# EAGLE board SR_Board (EAGLE 7.6.0)
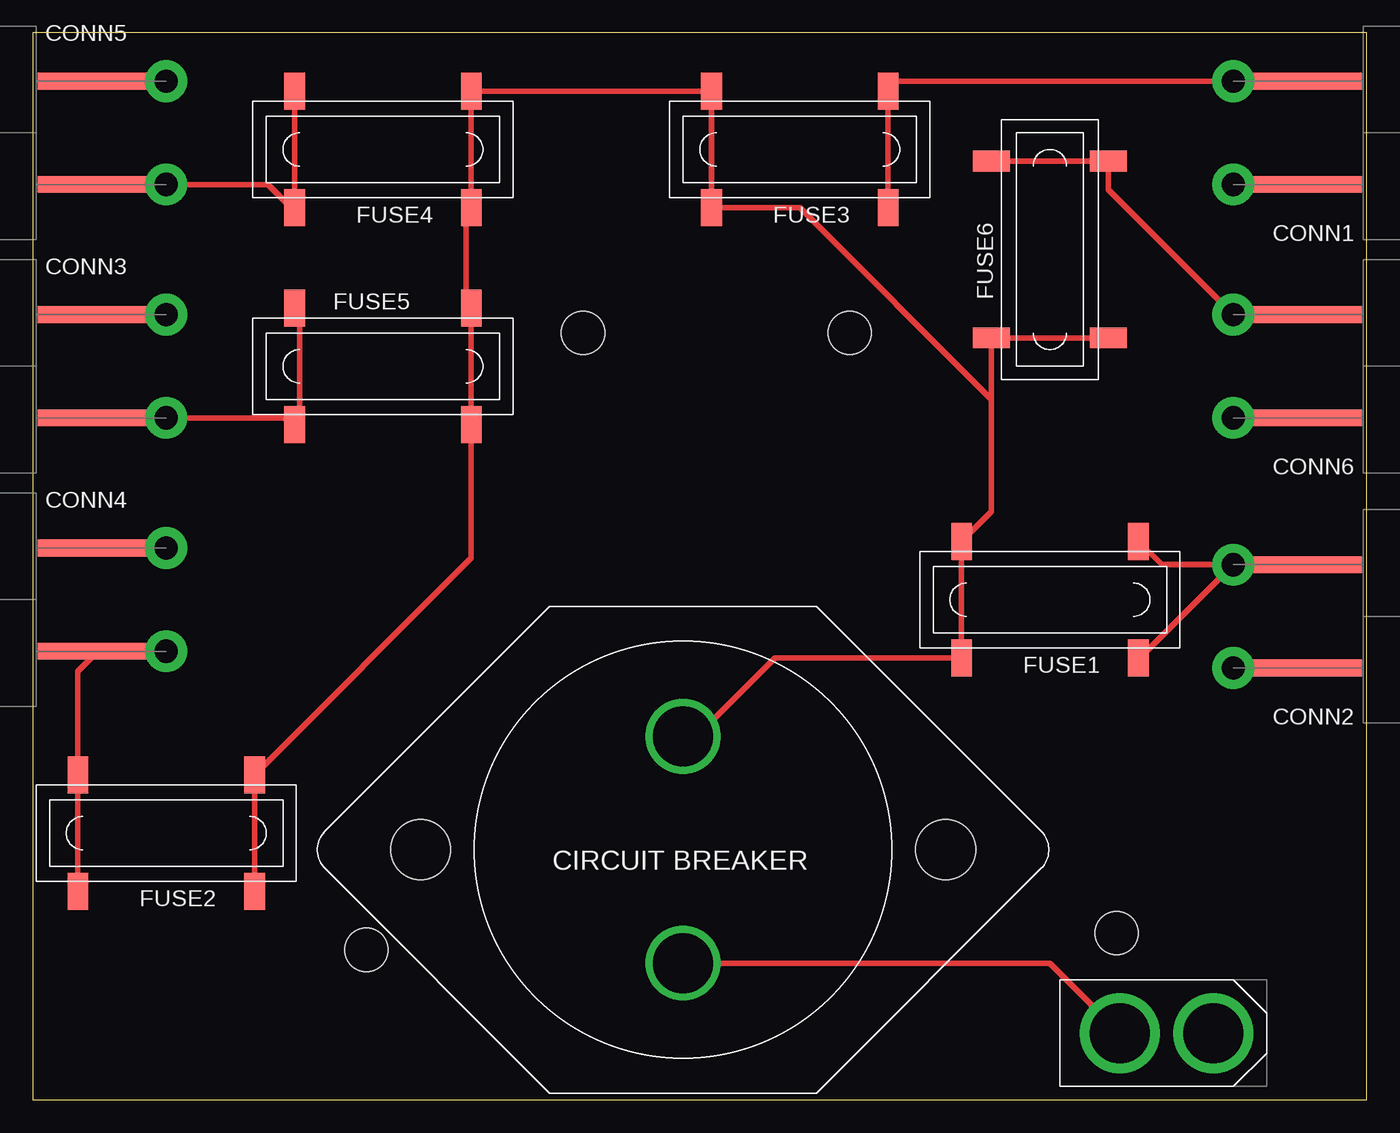
[diagram p0: board, top side]
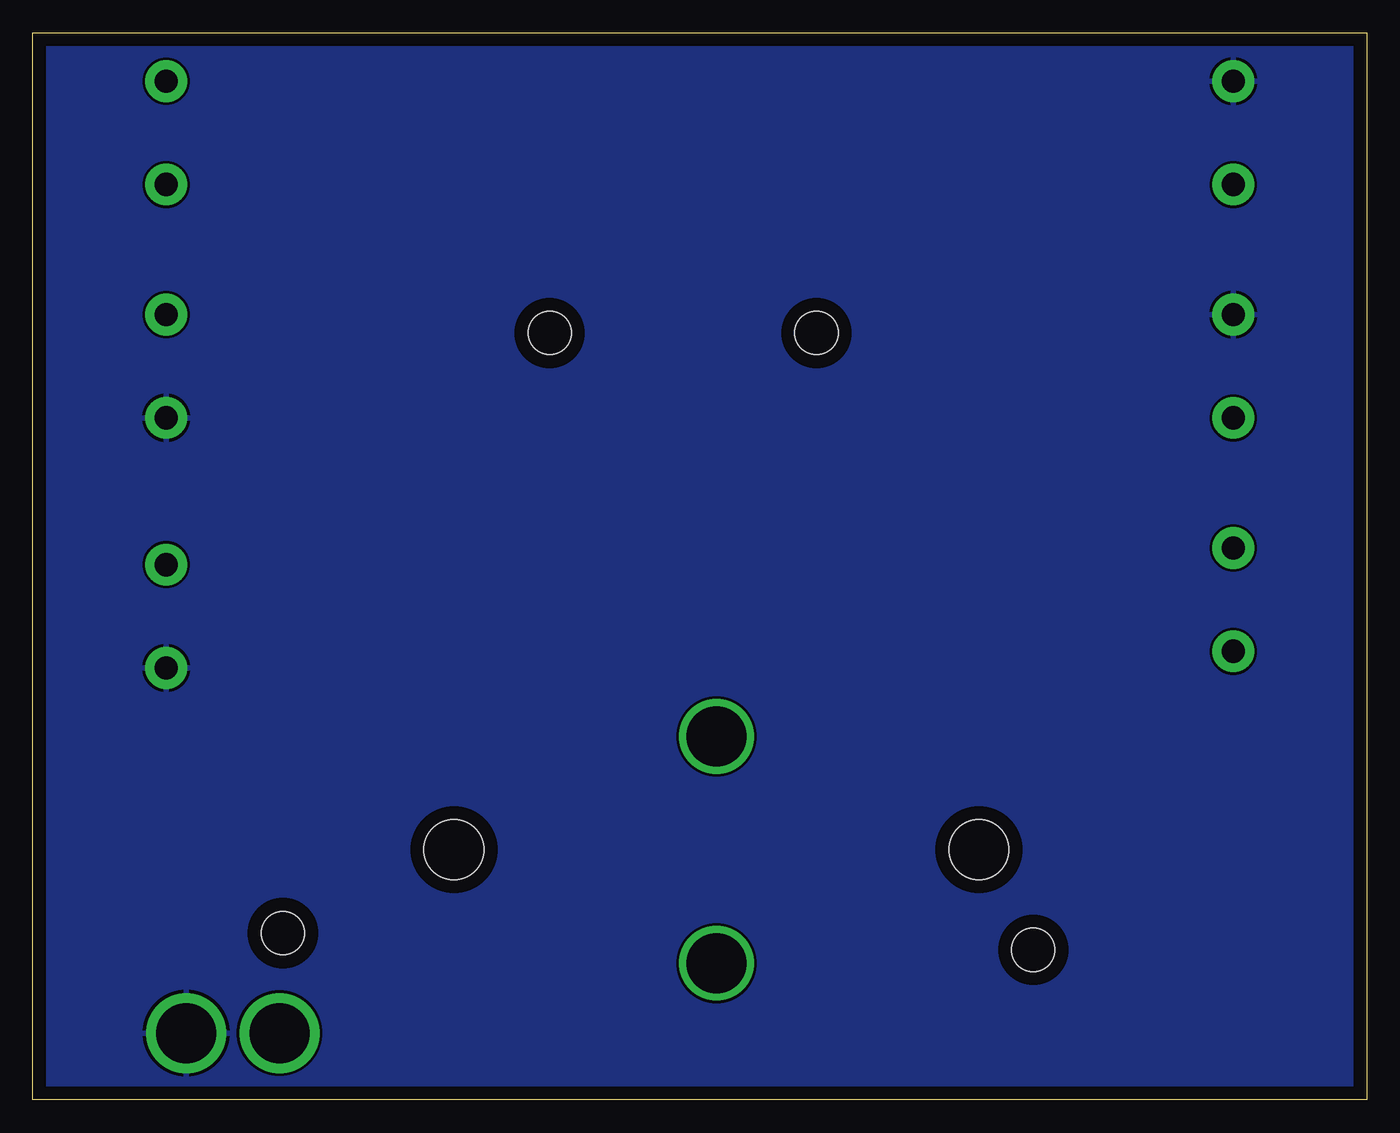
[diagram p1: board, bottom side, seen from below]

Size 101.6 x 81.28 mm. Coordinates in mm from the lower left corner, seen from the top.
Outline: 0,0 101.6,0 101.6,81.28 0,81.28 0,0
Copper layers (1*16): Top 0.035mm / dielectric 1.5mm / Bottom 0.035mm
Design rules "default": minimum track width 10mil, minimum drill 24mil, track to track 8mil, track to pad 8mil, pad to pad 8mil, via to via 8mil, smd to smd 8mil, copper to edge 40mil, drill to drill 8mil, minimum pad ring 10mil, minimum via ring 8mil, stop-mask expansion 4mil, vias tented up to drill 0mil, thermal gap 10mil

## Footprints (pad centres in the part's own frame; a part is rotated, then mirrored left to right if it is on the bottom)
CIRC_BREAKER = drill 4.572 pad 5.69: P$1 0,8.636; P$2 0,-8.636 | hole 4.572: -19.99,0; 19.99,0
ANDERSON_HORIZONTAL = drill 1.778 pad 3.175: PIN1 0,3.937; PIN2 0,-3.937 | smd 8.89 x 1.27: PIN1-LEAD -5.334,3.937; PIN2-LEAD -5.334,-3.937
FUSE_HOLDER_SMD = smd 1.575 x 2.819: P$1_DOWN -6.731,-4.445; P$1_UP -6.731,4.445; P$2_DOWN 6.731,-4.445; P$2_UP 6.731,4.445
XT60CONNECTOR = drill 4.572 pad 6.096: 12V -3.556,0; GND 3.556,0
STAND-OFF = hole 3.302: 0,0

## Placement (x,y rotation side)
CIRCUIT_BREAKER  CIRC_BREAKER  [CIRC_BREAKER]  49.53,19.05 180 top
CONN1  ANDERSONHORIZONTAL  [ANDERSON_HORIZONTAL]  91.44,73.66 180 top
CONN2  ANDERSONHORIZONTAL  [ANDERSON_HORIZONTAL]  91.44,36.83 180 top
CONN3  ANDERSONHORIZONTAL  [ANDERSON_HORIZONTAL]  10.16,55.88 0 top
CONN4  ANDERSONHORIZONTAL  [ANDERSON_HORIZONTAL]  10.16,38.1 0 top
CONN5  ANDERSONHORIZONTAL  [ANDERSON_HORIZONTAL]  10.16,73.66 0 top
CONN6  ANDERSONHORIZONTAL  [ANDERSON_HORIZONTAL]  91.44,55.88 180 top
FUSE1  FUSE_HOLDER_SMD  [FUSE_HOLDER_SMD]  77.47,38.1 180 top
FUSE2  FUSE_HOLDER_SMD  [FUSE_HOLDER_SMD]  10.16,20.32 180 top
FUSE3  FUSE_HOLDER_SMD  [FUSE_HOLDER_SMD]  58.42,72.39 180 top
FUSE4  FUSE_HOLDER_SMD  [FUSE_HOLDER_SMD]  26.67,72.39 180 top
FUSE5  FUSE_HOLDER_SMD  [FUSE_HOLDER_SMD]  26.67,55.88 0 top
FUSE6  FUSE_HOLDER_SMD  [FUSE_HOLDER_SMD]  77.47,64.77 90 top
U$1  XT60CONNECTOR  [XT60CONNECTOR]  86.36,5.08 0 top
U$2  [STAND-OFF]  25.4,11.43 0 top
U$3  [STAND-OFF]  41.91,58.42 0 top
U$4  [STAND-OFF]  62.23,58.42 0 top
U$5  [STAND-OFF]  82.55,12.7 0 top

## Library data of the parts
CIRCUIT_BREAKER = pie; MANUF: WAYTEK; MANUF-PN: 46977
CONN1-CONN6 = pie; PIE-INT-REF-NUM: Anderson
FUSE1-FUSE6 = pie; DIGIKEY-PN: 36-3587-ND; MANUF: KEYSTONE; MANUF-PN: 3587
U$1 = pie; PARTNUMBER: PRT-10474
U$2-U$5 = pie

## Nets
12V: CIRCUIT_BREAKER.P$2 FUSE1.P$2_DOWN FUSE1.P$2_UP FUSE2.P$1_DOWN FUSE2.P$1_UP FUSE3.P$2_DOWN FUSE3.P$2_UP FUSE4.P$1_DOWN FUSE4.P$1_UP FUSE5.P$2_DOWN FUSE5.P$2_UP FUSE6.P$1_DOWN FUSE6.P$1_UP
BAT: CIRCUIT_BREAKER.P$1 U$1.12V
GND: CONN2.PIN1 CONN2.PIN1-LEAD CONN3.PIN1 CONN3.PIN1-LEAD CONN5.PIN1 CONN5.PIN1-LEAD CONN6.PIN1 CONN6.PIN1-LEAD U$1.GND
N$1: CONN2.PIN2 CONN2.PIN2-LEAD FUSE1.P$1_DOWN FUSE1.P$1_UP
N$2: CONN5.PIN2 CONN5.PIN2-LEAD FUSE4.P$2_DOWN FUSE4.P$2_UP
N$3: CONN1.PIN2 CONN1.PIN2-LEAD FUSE3.P$1_DOWN FUSE3.P$1_UP
N$4: CONN3.PIN2 CONN3.PIN2-LEAD FUSE5.P$1_DOWN FUSE5.P$1_UP
N$5: CONN4.PIN2 CONN4.PIN2-LEAD FUSE2.P$2_DOWN FUSE2.P$2_UP
N$6: CONN4.PIN1 CONN4.PIN1-LEAD
N$7: CONN6.PIN2 CONN6.PIN2-LEAD FUSE6.P$2_DOWN FUSE6.P$2_UP
N$8: CONN1.PIN1 CONN1.PIN1-LEAD

## Tracks (layer width: path | path; a pad name or v marks a point on that pad's centre or on a via)
12V
  Top 0.406: 52.07,76.2 51.44,76.83 FUSE4.P$1_DOWN FUSE4.P$1_UP 33.4,67.69 33.02,67.31 33.02,59.94 | 52.07,76.2 52.07,76.45 FUSE3.P$2_DOWN | FUSE6.P$1_DOWN FUSE6.P$1_UP 73.03,53.34 | 73.03,53.34 73.03,44.83 FUSE1.P$2_DOWN FUSE1.P$2_UP | FUSE1.P$2_UP 70.74,33.4 71.12,33.02 71.12,33.27 FUSE1.P$2_UP | FUSE1.P$2_UP 56.52,33.66 49.53,26.67 CIRCUIT_BREAKER.P$2 | 73.03,53.34 58.42,67.94 FUSE3.P$2_UP 51.69,75.82 52.07,76.2 | 33.02,59.69 33.02,59.94 | 33.02,59.94 FUSE5.P$2_UP FUSE5.P$2_DOWN | FUSE5.P$2_DOWN 33.4,51.18 33.02,50.8 | FUSE5.P$2_DOWN 33.4,41.27 FUSE2.P$1_DOWN FUSE2.P$1_UP
BAT
  Top 0.406: CIRCUIT_BREAKER.P$1 77.47,10.41 U$1.12V
GND
  Top 0.406: CONN6.PIN1 CONN6.PIN1-LEAD | CONN6.PIN1-LEAD 97.66,51.94 97.79,52.07 96.9,52.07 CONN6.PIN1-LEAD | CONN5.PIN1 CONN5.PIN1-LEAD | CONN3.PIN1 5.21,59.82 5.08,59.69 4.95,59.69 CONN3.PIN1-LEAD | CONN2.PIN1 CONN2.PIN1-LEAD
  pour Bottom: 0,81.28 101.6,81.28 101.6,0 0,0
N$1
  Top 0.406: CONN2.PIN2 85.98,40.77 FUSE1.P$1_DOWN | FUSE1.P$1_UP 84.33,33.66 CONN2.PIN2 | CONN2.PIN2 CONN2.PIN2-LEAD | CONN2.PIN2-LEAD 97.66,40.77 97.79,40.64 96.65,40.64 | 91.44,40.64 96.65,40.64 | 96.65,40.64 CONN2.PIN2-LEAD
N$2
  Top 0.406: 20.32,76.45 FUSE4.P$2_DOWN | FUSE4.P$2_DOWN FUSE4.P$2_UP 20.32,67.56 20.32,67.31 17.91,69.72 CONN5.PIN2 CONN5.PIN2-LEAD | FUSE4.P$2_DOWN 19.94,77.09 20.32,77.47 20.32,77.22 FUSE4.P$2_DOWN
N$3
  Top 0.406: FUSE3.P$1_UP FUSE3.P$1_DOWN 65.91,77.6 CONN1.PIN2 CONN1.PIN2-LEAD
N$4
  Top 0.406: CONN3.PIN2-LEAD CONN3.PIN2 19.18,51.94 19.94,51.18 | FUSE5.P$1_UP 20.32,59.94 20.32,50.8 19.94,51.18 | FUSE5.P$1_DOWN 19.94,51.18
N$5
  Top 0.406: CONN4.PIN2-LEAD CONN4.PIN2 10.03,34.29 5.08,34.29 3.43,32.64 FUSE2.P$2_DOWN FUSE2.P$2_UP
N$6
  Top 0.406: CONN4.PIN1 CONN4.PIN1-LEAD
N$7
  Top 0.406: FUSE6.P$2_UP FUSE6.P$2_DOWN 81.92,69.34 CONN6.PIN2 CONN6.PIN2-LEAD
N$8
  Top 0.406: CONN1.PIN1 CONN1.PIN1-LEAD